# Altium PCB PCB1.PcbDoc (part 1 of 2)
Units mm, origin at the board's own origin, x right, y up, seen from the top; angles counter-clockwise.
Board outline 39 x 39 mm, 4 copper layers (Top Layer, Mid Layer 1, Mid Layer 2, Bottom Layer), stack 1.57 mm thick; 85 components, 70 nets, 394 pads, 166 vias.
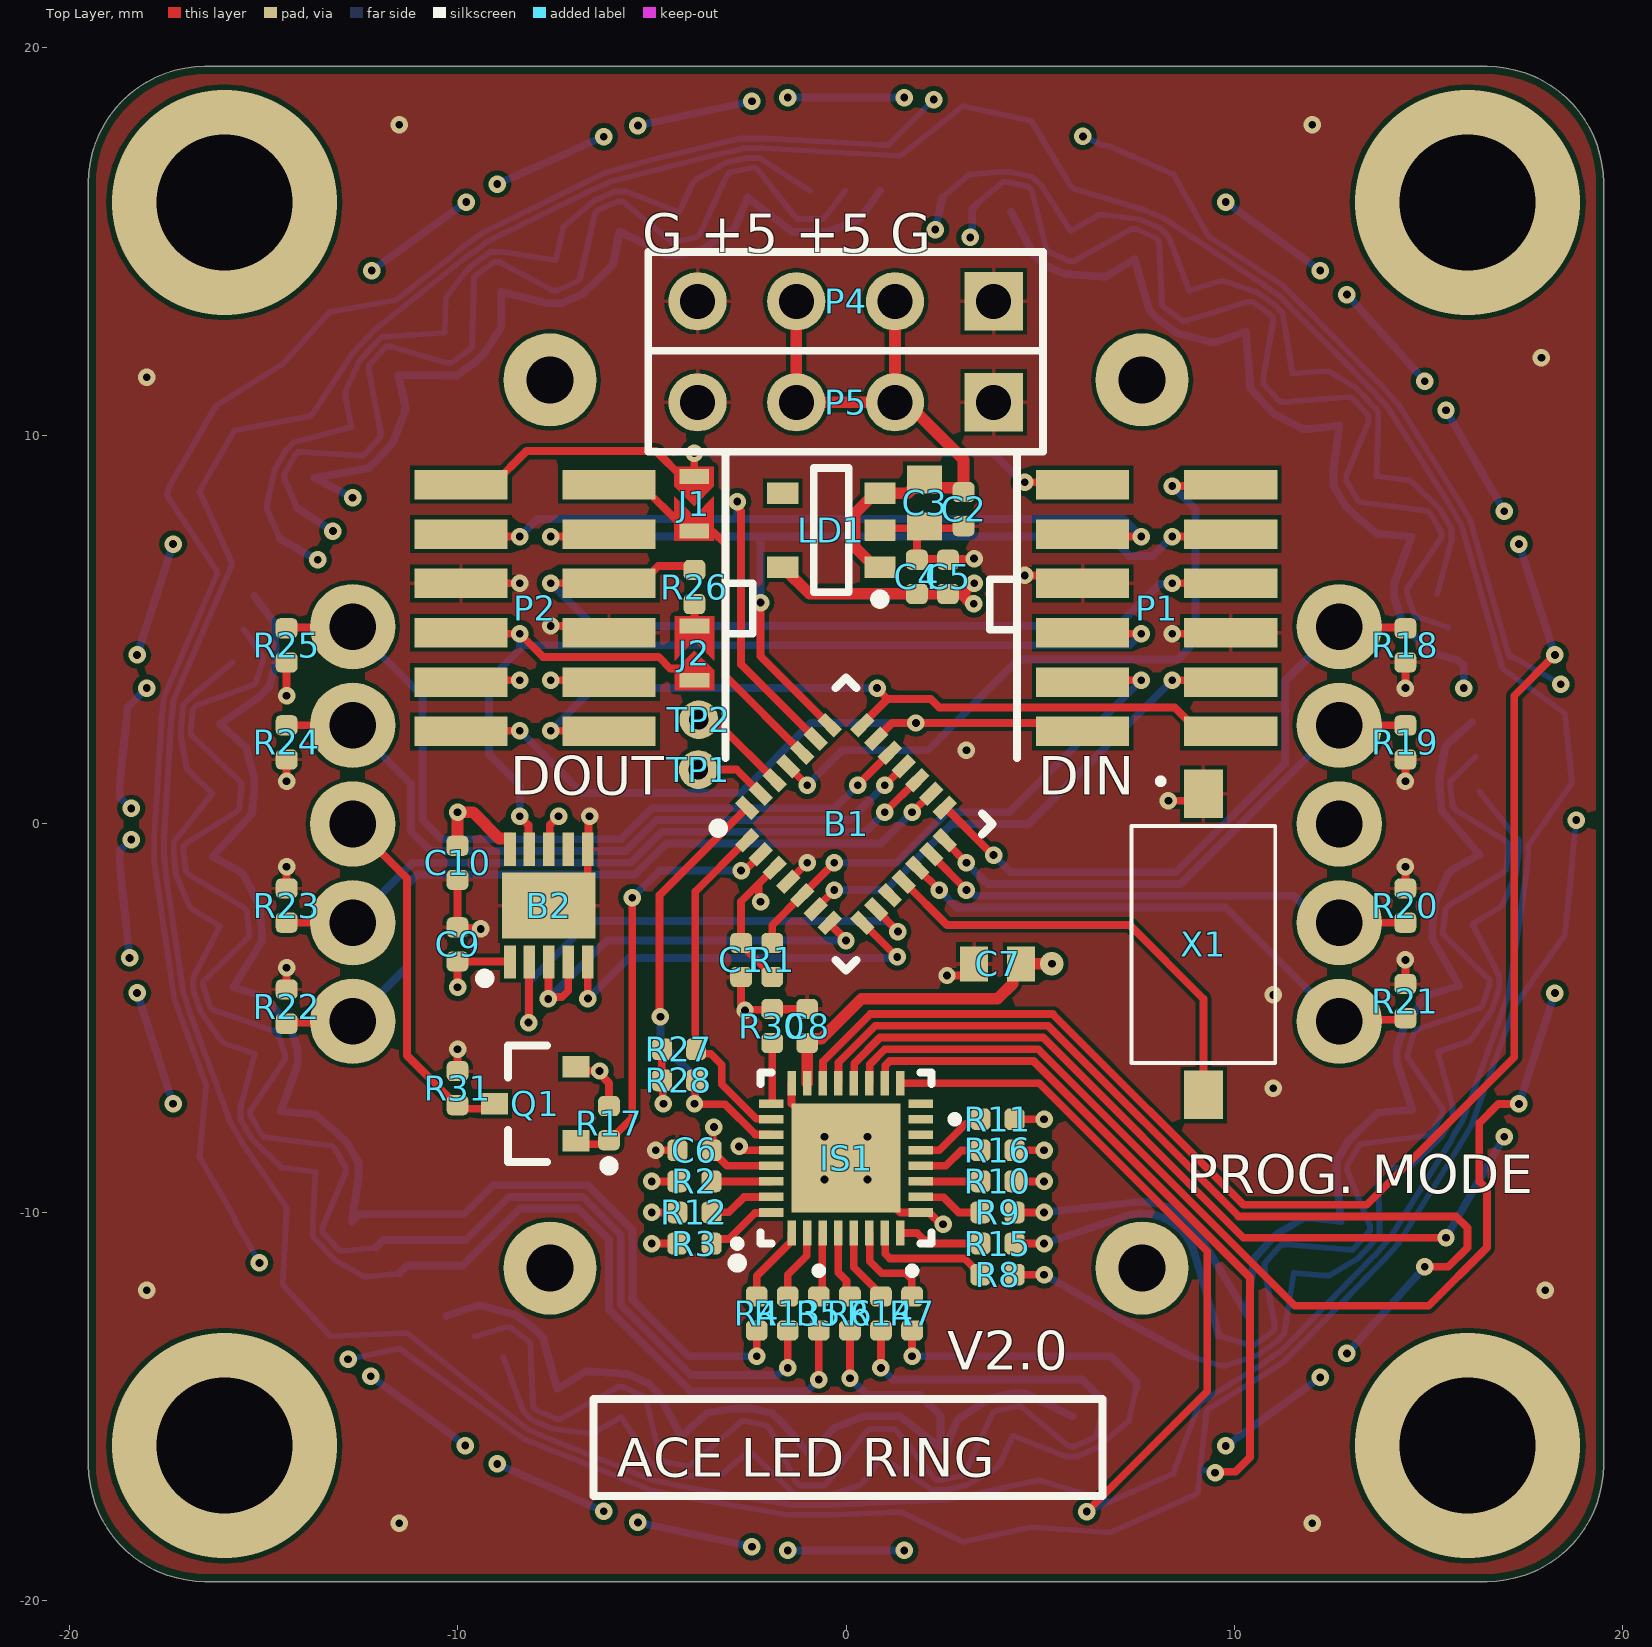
[diagram p0: Top Layer view]
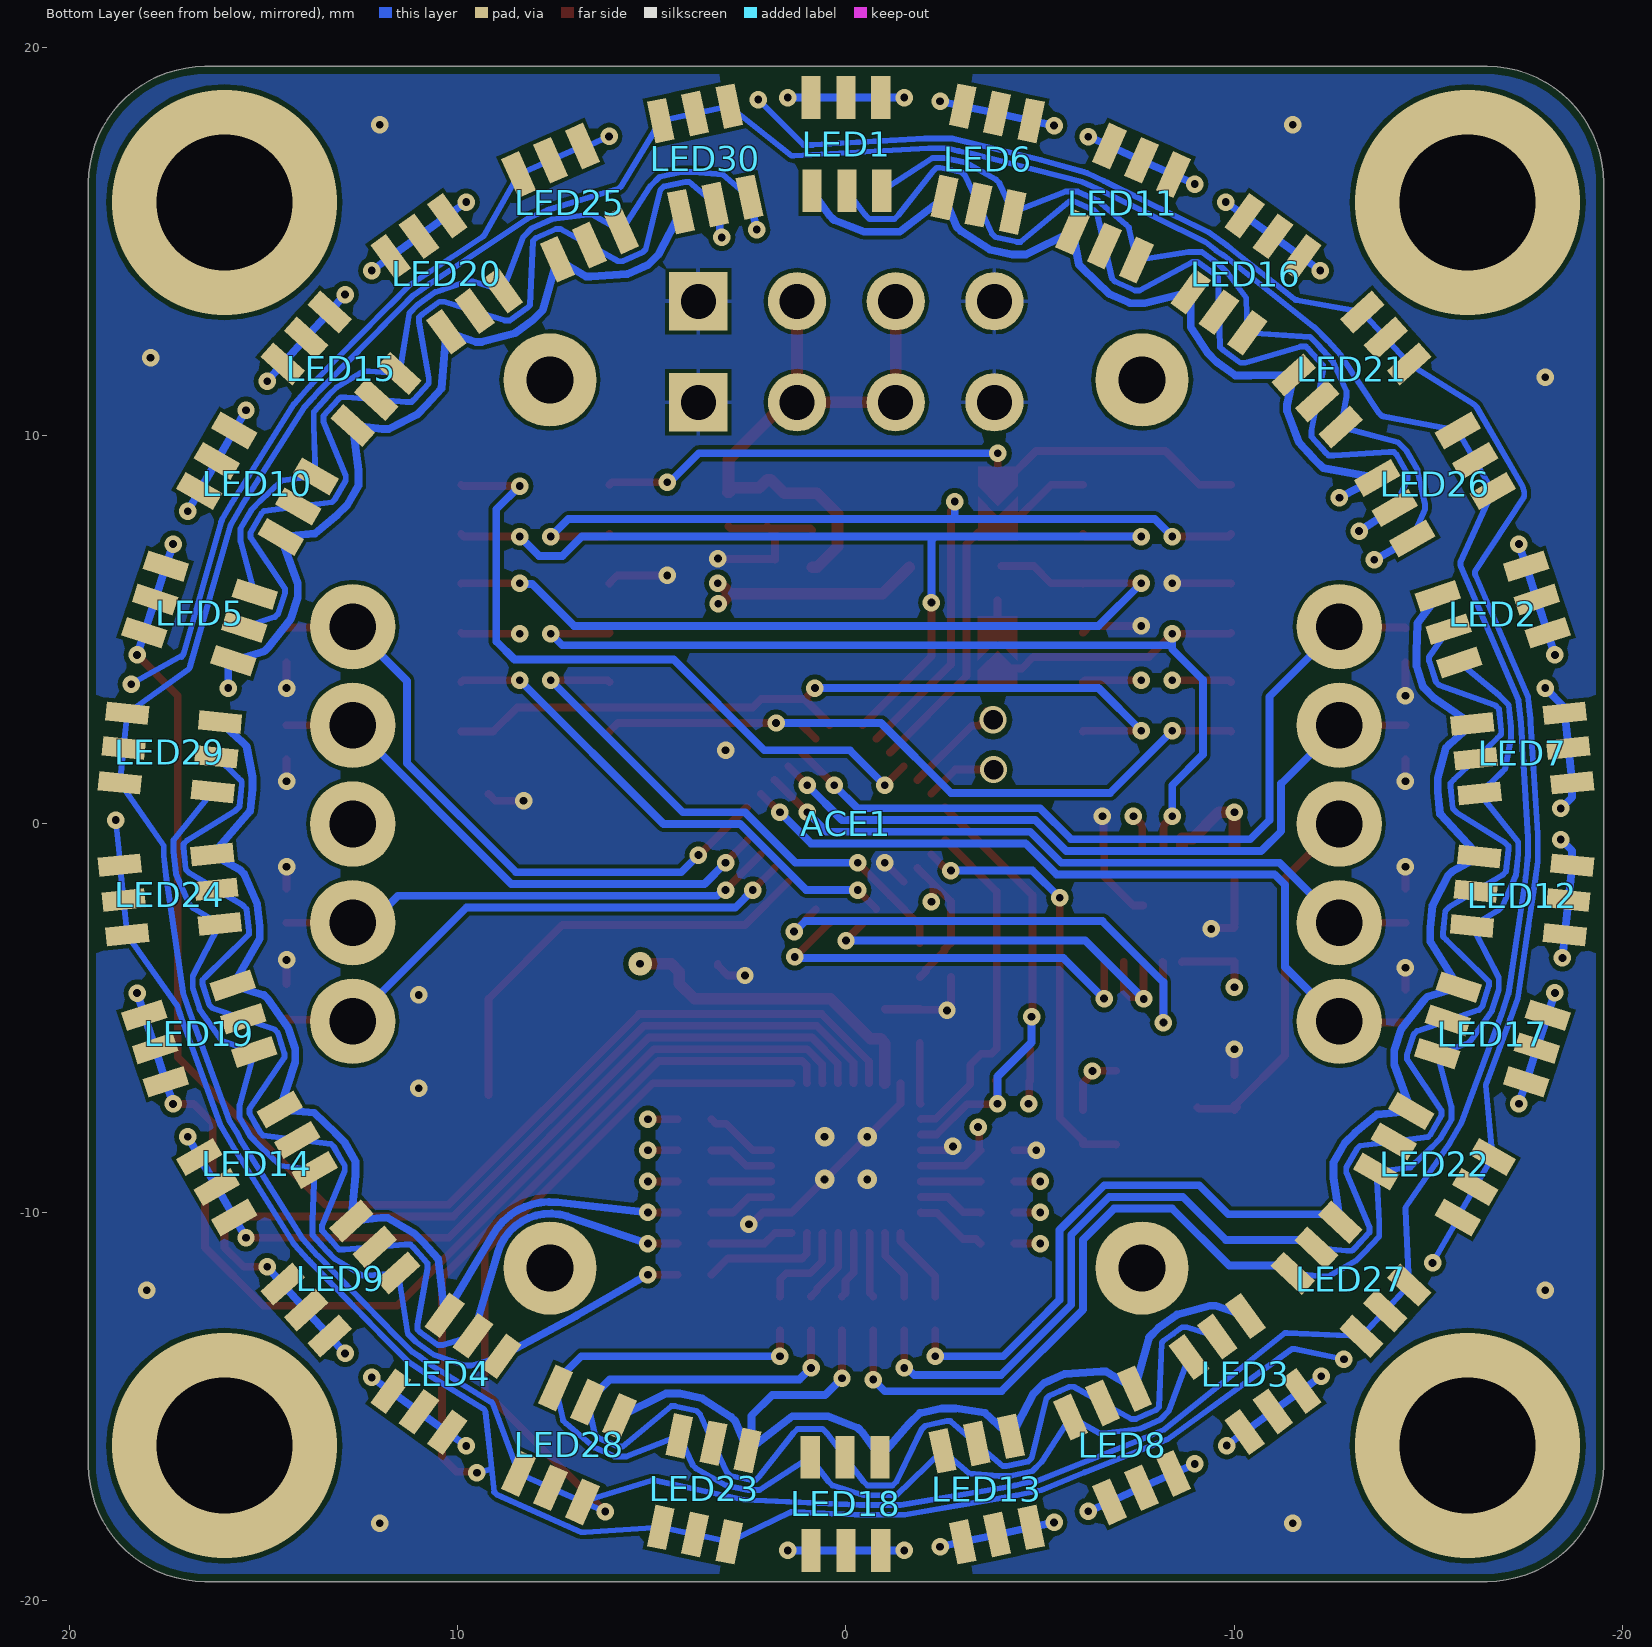
[diagram p1: Bottom Layer view, seen from below]
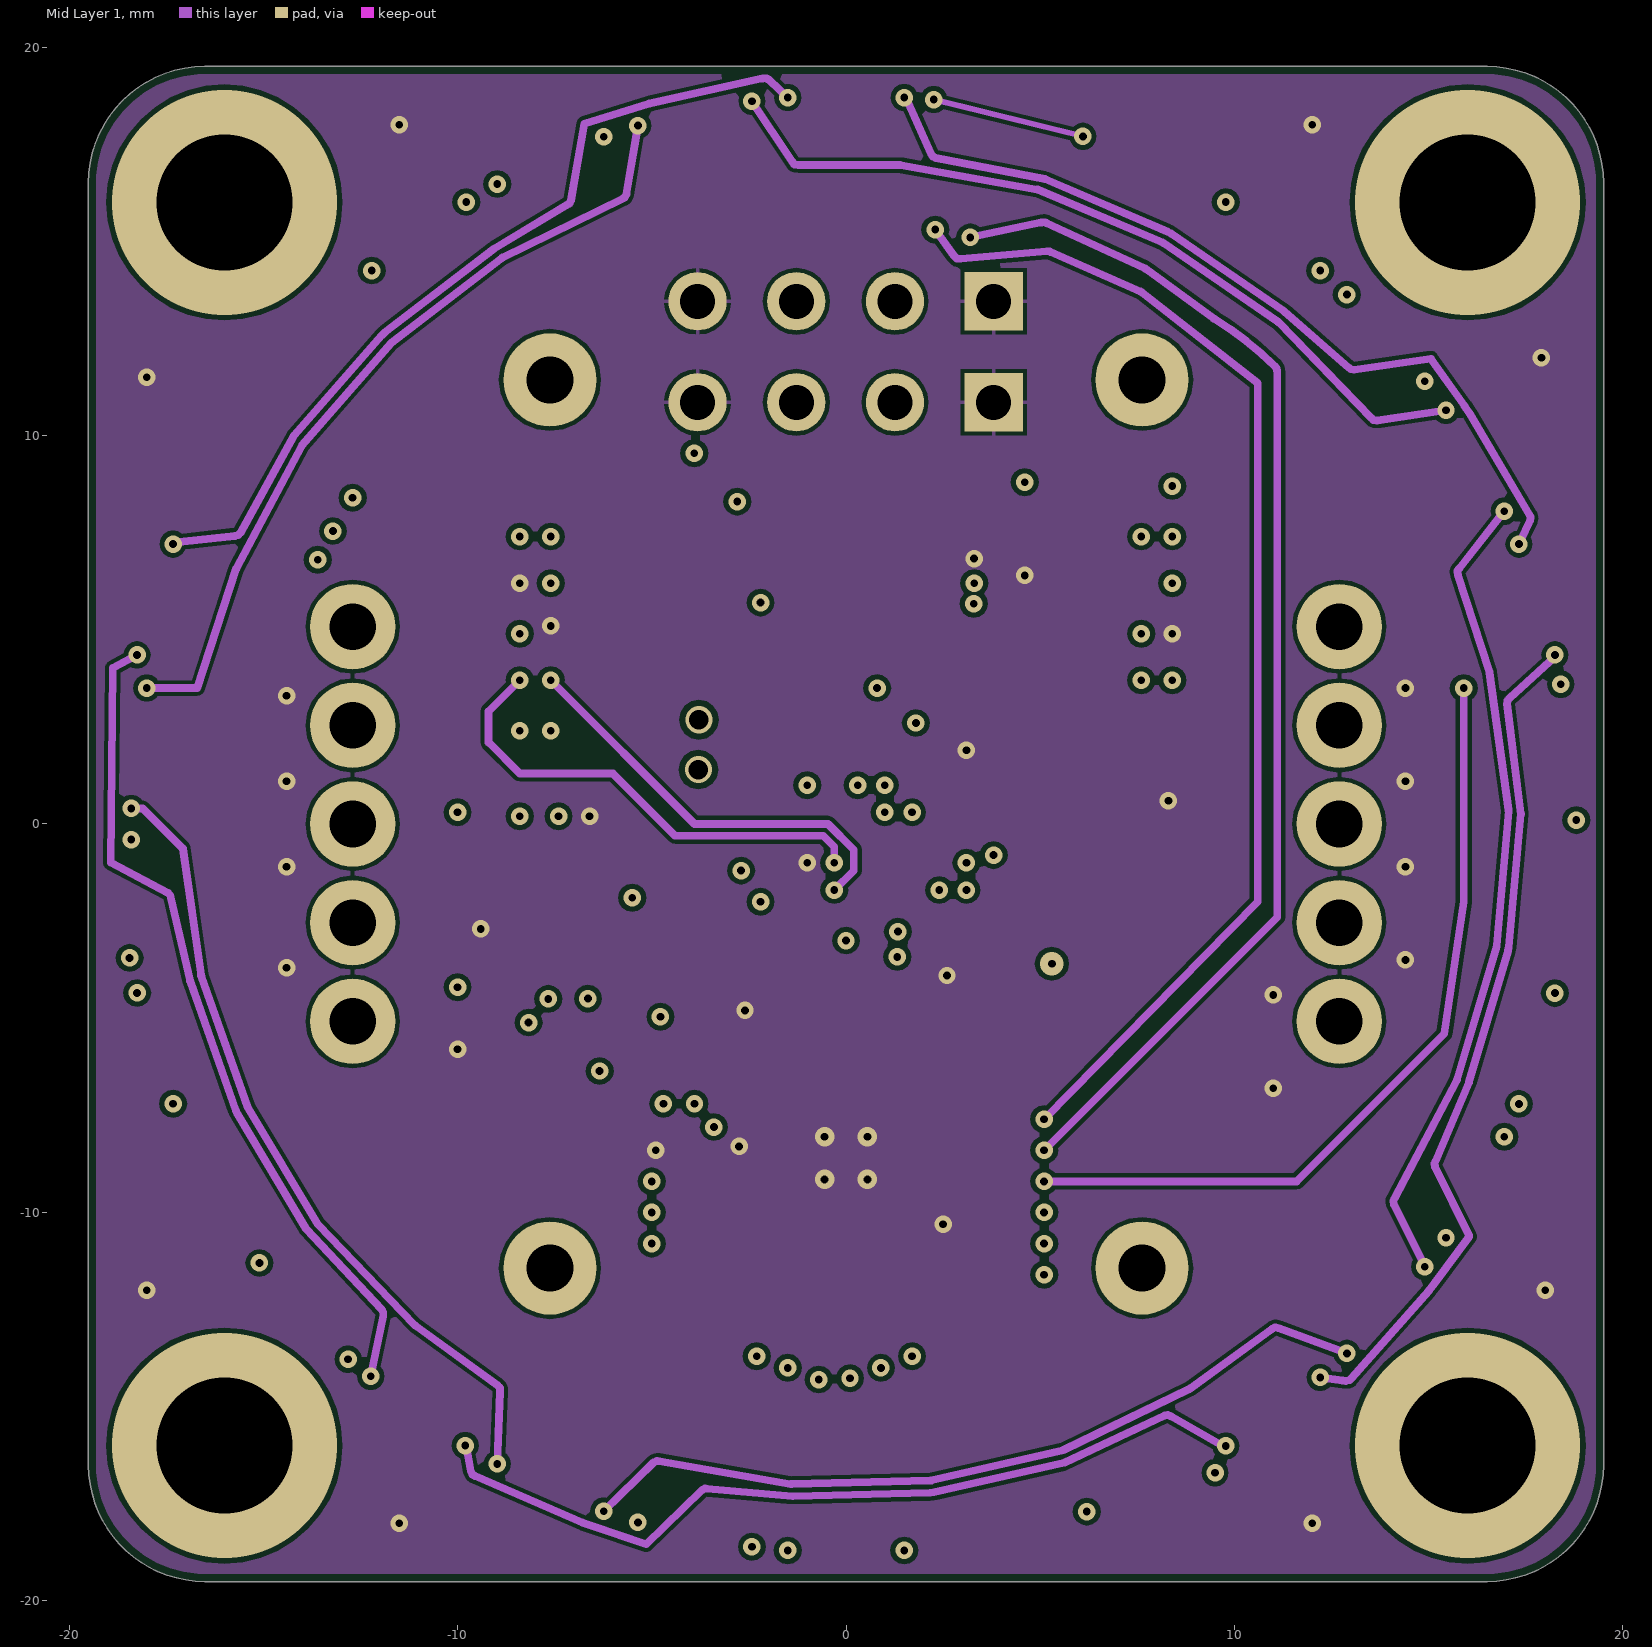
[diagram p2: Mid Layer 1]
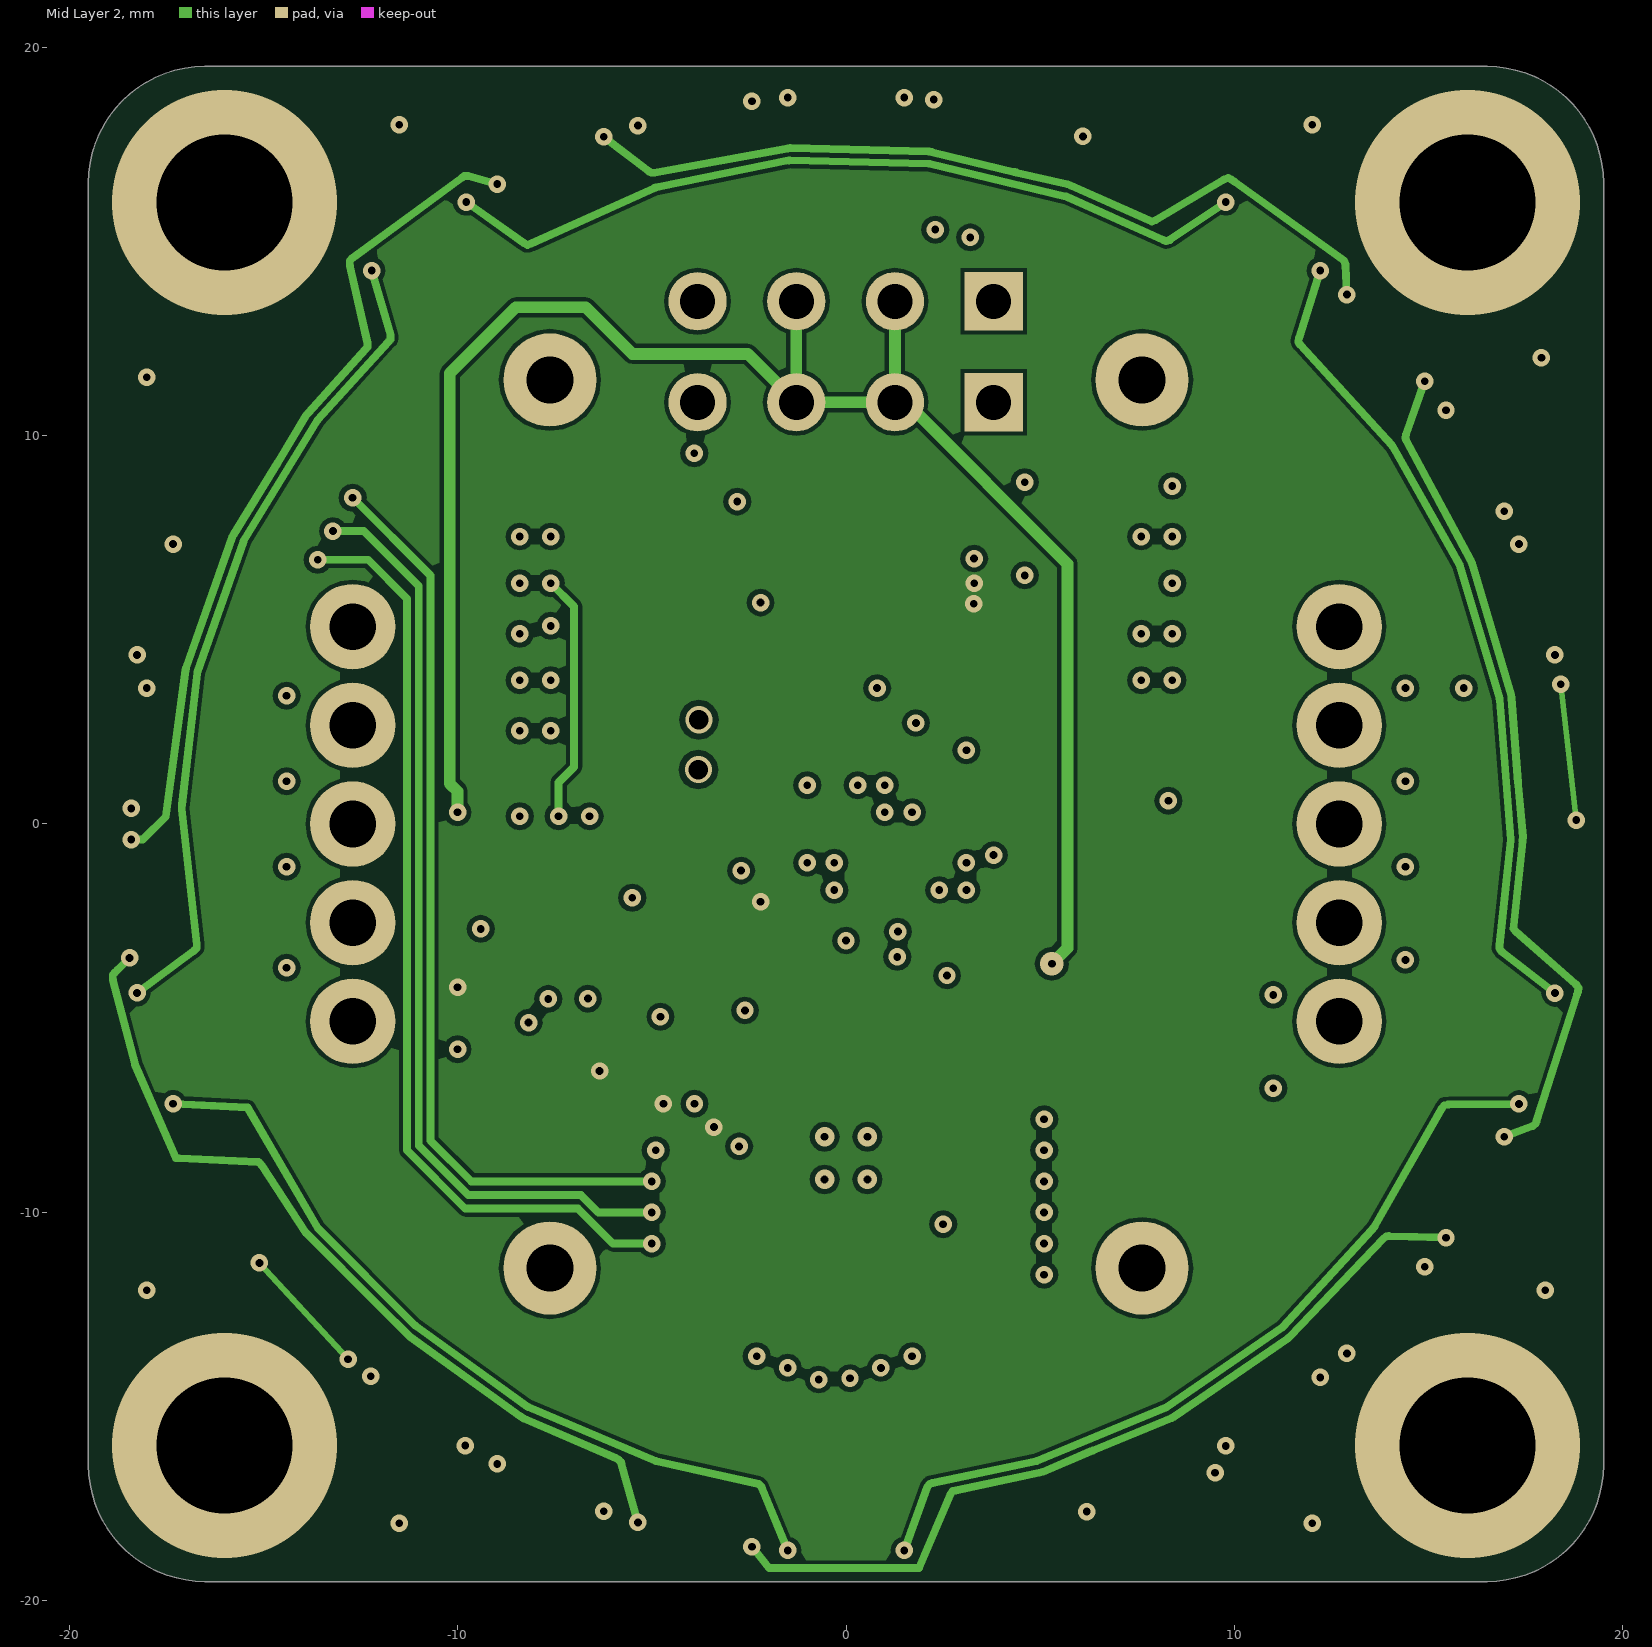
[diagram p3: Mid Layer 2]
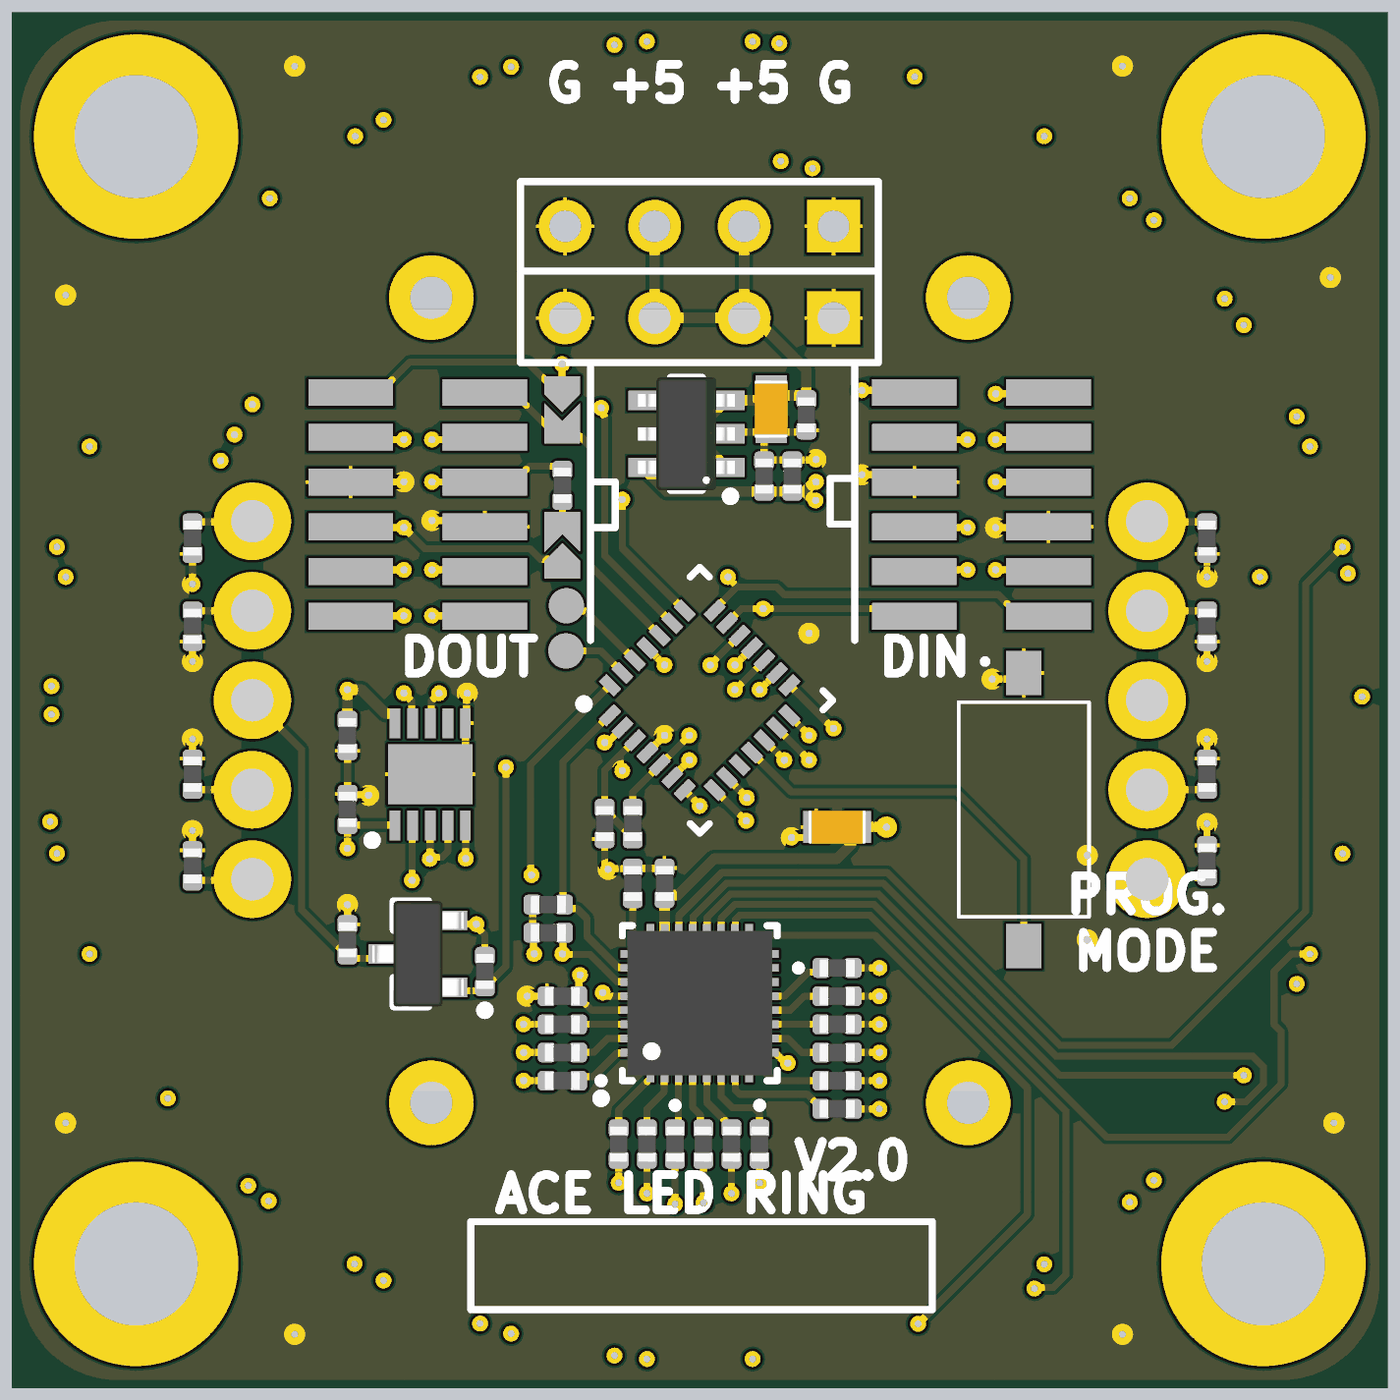
[diagram p5: 3D render of the assembled board from above, using the file's embedded part models]
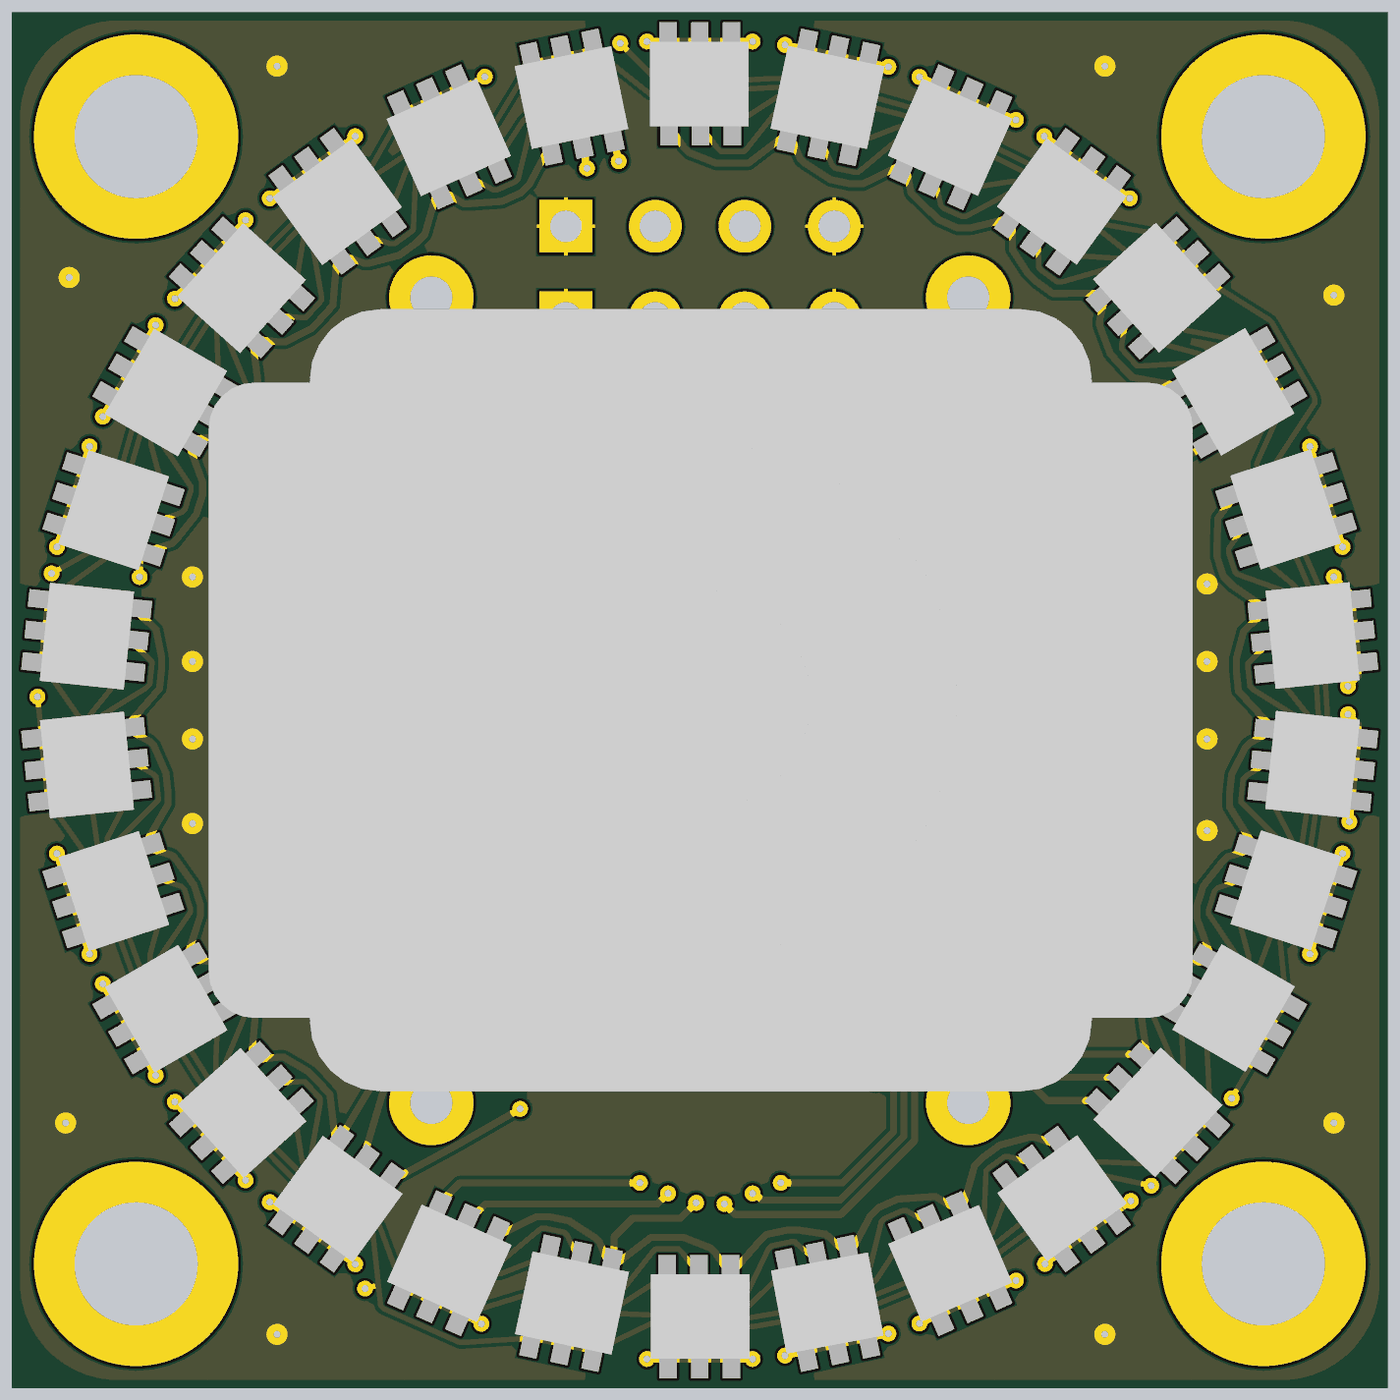
[diagram p6: 3D render of the assembled board from below, using the file's embedded part models]

## Layer stack, top to bottom
Top Solder: solder mask 0.0127, Solder Resist, Dk 3.8
Top Layer: signal copper 0.035
Dielectric 1: prepreg 0.2, 7628, Dk 4.6
Mid Layer 1: signal copper 0.0175
Core: core 1.065, FR-4, Dk 4.5
Mid Layer 2: signal copper 0.0175
Dielectric 2: prepreg 0.2, 7628, Dk 4.6
Bottom Layer: signal copper 0.035
Bottom Solder: solder mask 0.0127, Solder Resist, Dk 3.8

## Board outline
-19.5,-16.5 ccw(c-16.5,-16.5) -16.5,-19.5 0,-19.5 16.5,-19.5 ccw(c16.5,-16.5) 19.5,-16.5 19.5,16.5 ccw(c16.5,16.5) 16.5,19.5 0,19.5 -16.5,19.5 ccw(c-16.5,16.5) -19.5,16.5

## Design rules (kind name [scope] priority, off if disabled: settings)
BoardOutlineClearance [All] p1: gap=0.2 ignorepadtopadclearanceinfootprint=FALSE
Clearance [All] p1: gap=0.102 ignorepadtopadclearanceinfootprint=FALSE except(0.127: Arc-Via Track-Via SMDPad-Via THPad-Via Via-Via Via-Fill Via-Poly Via-Region Via-Text; 0.25: Arc-Hole Track-Hole SMDPad-Hole THPad-Hole Via-Hole Fill-Hole Poly-Hole Region-Hole Text-Hole)
ComponentClearance [All] p1: gap=0.102 collisioncheckmode=3 verticalgap=0.102 showdistances=TRUE
DiffPairsRouting [All] p1: maxlimit=0.102 minlimit=0.102 mostfreqgap=0.102 toplayer_minwidth=0.102 toplayer_maxwidth=1816.048 toplayer_prefwidth=0.102 midlayer1_minwidth=0.102 midlayer1_maxwidth=1816.048 midlayer1_prefwidth=0.102 midlayer2_minwidth=0.102 midlayer2_maxwidth=1816.048 midlayer2_prefwidth=0.102 bottomlayer_minwidth=0.102 bottomlayer_maxwidth=1816.048 bottomlayer_prefwidth=0.102 maxuncoupledlength=12.7
Height [All] p1: minheight=0 maxheight=1816.048 prefheight=12.7
HoleSize [All] p1: absolutevalues=TRUE maxlimit=6.3 minlimit=0.2 maxpercent=80.000 minpercent=20.000
HoleToHoleClearance [All] p1: gap=0.25 allowstackedmicrovias=FALSE
MinimumAnnularRing [All] p1: minimumring=0.076
MinimumSolderMaskSliver [All] p1: minsoldermaskwidth=0
PlaneClearance [All] p1: clearance=0.102
PlaneConnect PlaneConnectPowerPads [InPadClass('PowerPads')] p1: planeconnectstyle=Direct reliefexpansion=0.508 reliefentries=4 reliefconductorwidth=0.254 reliefairgap=0.254
PlaneConnect [All] p2: pad.planeconnectstyle=Relief pad.reliefexpansion=0.3 pad.reliefentries=4 pad.reliefconductorwidth=0.102 pad.reliefairgap=0.102 via.planeconnectstyle=Direct via.reliefexpansion=0.3 via.reliefentries=4 via.reliefconductorwidth=0.127 via.reliefairgap=0.127
PolygonConnect PolygonConnectPowerPads [All vs (InPadClass('PowerPads'))] p1: connectstyle=Direct reliefconductorwidth=0.254 reliefentries=4 polygonreliefangle="90 Angle" airgapwidth=0.254
PolygonConnect [All] p2: thpad.connectstyle=Relief thpad.reliefconductorwidth=0.102 thpad.reliefentries=4 thpad.polygonreliefangle="90 Angle" thpad.airgapwidth=0.102 smdpad.connectstyle=Relief smdpad.reliefconductorwidth=0.102 smdpad.reliefentries=4 smdpad.polygonreliefangle="90 Angle" smdpad.airgapwidth=0.102 via.connectstyle=Direct via.reliefconductorwidth=0.127 via.reliefentries=4 via.polygonreliefangle="90 Angle" via.airgapwidth=0.127
RoutingVias [All] p1: holewidth=0.2 width=0.45 viastyle="Through Hole" minholewidth=0.2 minwidth=0.45 maxholewidth=6.3 maxwidth=6.55
SilkToSilkClearance [All] p1: silktosilkclearance=0
SilkToSolderMaskClearance [IsPad] p1: minsilkscreentomaskgap=0.102 clearancetoexposedcopper=TRUE
SolderMaskExpansion [All] p1: expansion=0.075 istentingtop=FALSE
Width [All] p1: maxlimit=1816.048 minlimit=0.102 preferedwidth=0.102
20 further rules are at their usual default settings.

## Classes and differential pairs
net class ACE[1..8]: ACE1 ACE2 ACE3 ACE4 ACE5 ACE6 ACE7 ACE8
component class U_Power: C2 C3 C4 C5 LD1 P4 P5
component class U_MCU: B1 B2 C1 C9 C10 J1 J2 P1 P2 R1 R26 TP1 TP2 X1
component class U_led_ring: C6 C7 C8 IS1 LED1 LED2 LED3 LED4 LED5 LED6 LED7 LED8 LED9 LED10 LED11 LED12 LED13 LED14 LED15 LED16 LED17 LED18 LED19 LED20 LED21 LED22 LED23 LED24 LED25 LED26 LED27 LED28 LED29 LED30 R2 R3 R4 R5 R6 R7 R8 R9 R10 R11 R12 R13 R14 R15 R16 R27 R28 R30
component class U_ACE: ACE1 Q1 R17 R18 R19 R20 R21 R22 R23 R24 R25 R31

## Components (designator, comment, footprint, x,y, rotation, side; value= is the part's Value field where it differs from the comment)
ACE1 "Bourns ACE 128" "BOURNS ACE 128" 0,0 r0 bottom locked
B1 "STM32C031G6U6" QFN50P400X400X60-28N-D 0,0 r45 top
B2 "XR33202EEHBTR-F" SON50P300X300X80-11N-D -7.65,-2.1 r90 top
C1 "100n" R1005_0402i_L -2.7,-3.5 r270 top
C2 "100n" R1005_0402i_L 3.026,8.103 r270 top
C3 "22u" C1608_0603I_L 2.026,8.264 r270 top
C4 "1u" R1005_0402i_L 1.826,6.364 r90 top
C5 "100n" R1005_0402i_L 2.626,6.364 r90 top
C6 "100n" R1005_0402i_L -3.9,-8.4 r180 top
C7 "1u" C1608_0603I_L 3.9,-3.6 r180 top
C8 "100n" R1005_0402i_L -1,-5.2 r90 top
C9 "100n" R1005_0402i_L -10,-3.1 r90 top
C10 "100n" R1005_0402i_L -10,-1 r270 top
IS1 "IS31FL3729" QFN40P400X400X80_HS-33L 0,-8.6 r90 top
J1 "solder_jumper" SOLDER_JUMPER_TRIANGLE -3.4,7.8 r90 top
J2 "solder_jumper" SOLDER_JUMPER_TRIANGLE -4.408,4.843 r270 top
LD1 "NCP115 3.3V" TSOP95P280X110-6L -0.379,7.564 r180 top
LED1 "SMB-LED" ASMB-LED 0,17.5 r270 bottom
LED2 "SMB-LED" ASMB-LED -16.643,5.408 r342 bottom
LED3 "SMB-LED" ASMB-LED -10.283,-14.15 r54 bottom
LED4 "SMB-LED" ASMB-LED 10.286,-14.158 r126 bottom
LED5 "SMB-LED" ASMB-LED 16.643,5.408 r198 bottom
LED6 "SMB-LED" ASMB-LED -3.638,17.118 r282 bottom
LED7 "SMB-LED" ASMB-LED -17.404,1.829 r354 bottom
LED8 "SMB-LED" ASMB-LED -7.118,-15.987 r66 bottom
LED9 "SMB-LED" ASMB-LED 13.005,-11.71 r138 bottom
LED10 "SMB-LED" ASMB-LED 15.155,8.75 r210 bottom
LED11 "SMB-LED" ASMB-LED -7.118,15.987 r294 bottom
LED12 "SMB-LED" ASMB-LED -17.404,-1.829 r6 bottom
LED13 "SMB-LED" ASMB-LED -3.638,-17.118 r78 bottom
LED14 "SMB-LED" ASMB-LED 15.155,-8.75 r150 bottom
LED15 "SMB-LED" ASMB-LED 13.005,11.71 r222 bottom
LED16 "SMB-LED" ASMB-LED -10.286,14.158 r306 bottom
LED17 "SMB-LED" ASMB-LED -16.644,-5.405 r17.99 bottom
LED18 "SMB-LED" ASMB-LED 0,-17.5 r90 bottom
LED19 "SMB-LED" ASMB-LED 16.643,-5.408 r162 bottom
LED20 "SMB-LED" ASMB-LED 10.286,14.158 r234 bottom
LED21 "SMB-LED" ASMB-LED -13.005,11.71 r318 bottom
LED22 "SMB-LED" ASMB-LED -15.155,-8.75 r30 bottom
LED23 "SMB-LED" ASMB-LED 3.638,-17.118 r102 bottom
LED24 "SMB-LED" ASMB-LED 17.404,-1.829 r174 bottom
LED25 "SMB-LED" ASMB-LED 7.118,15.987 r246 bottom
LED26 "SMB-LED" ASMB-LED -15.155,8.75 r330 bottom
LED27 "SMB-LED" ASMB-LED -13.005,-11.71 r42.99 bottom
LED28 "SMB-LED" ASMB-LED 7.118,-15.987 r114 bottom
LED29 "SMB-LED" ASMB-LED 17.404,1.829 r186 bottom
LED30 "SMB-LED" ASMB-LED 3.638,17.118 r258 bottom
P1 "Input" "1.27mm SMD conn" 7.996,5.559 r90 top
P2 "Output" "1.27mm SMD conn" -8.006,5.559 r90 top
P4 "Header 4" HDR1X4 3.8,13.454 r180 top
P5 "Header 4" HDR1X4 3.8,10.854 r180 top
Q1 "NX3008PBKT" SOT95P230X110-3L -8,-7.2 r180 top
R1 "100k" R1005_0402i_L -1.9,-3.5 r90 top
R2 "20" R1005_0402i_L -3.9,-9.2 r180 top
R3 "51" R1005_0402i_L -3.9,-10.8 r180 top
R4 "20" R1005_0402i_L -2.3,-12.6 r270 top
R5 "51" R1005_0402i_L -0.7,-12.6 r270 top
R6 "20" R1005_0402i_L 0.1,-12.6 r270 top
R7 "51" R1005_0402i_L 1.7,-12.6 r270 top
R8 "20" R1005_0402i_L 3.9,-11.6 r0 top
R9 "51" R1005_0402i_L 3.9,-10 r0 top
R10 "20" R1005_0402i_L 3.9,-9.2 r0 top
R11 "51" R1005_0402i_L 3.9,-7.6 r0 top
R12 "20" R1005_0402i_L -3.9,-10 r180 top
R13 "20" R1005_0402i_L -1.5,-12.6 r270 top
R14 "20" R1005_0402i_L 0.9,-12.6 r270 top
R15 "20" R1005_0402i_L 3.9,-10.8 r0 top
R16 "20" R1005_0402i_L 3.9,-8.4 r0 top
R17 "100k" R1005_0402i_L -6.1,-7.7 r90 top
R18 "10k" R1005_0402i_L 14.4,4.6 r90 top
R19 "10k" R1005_0402i_L 14.4,2.1 r90 top
R20 "10k" R1005_0402i_L 14.4,-2.1 r270 top
R21 "10k" R1005_0402i_L 14.4,-4.56 r270 top
R22 "10k" R1005_0402i_L -14.4,-4.7 r270 top
R23 "10k" R1005_0402i_L -14.4,-2.1 r270 top
R24 "10k" R1005_0402i_L -14.4,2.1 r90 top
R25 "10k" R1005_0402i_L -14.4,4.6 r90 top
R26 "120" R1005_0402i_L -3.9,6.1 r90 top
R27 "10k" R1005_0402i_L -4.3,-5.8 r0 top
R28 "10k" R1005_0402i_L -4.3,-6.6 r0 top
R30 "100k" R1005_0402i_L -1.9,-5.2 r90 top
R31 "100k" R1005_0402i_L -10,-6.8 r270 top
TP1 "PAD" PAD -3.8,1.4 r90 top
TP2 "PAD" PAD -3.785,2.683 r90 top
X1 "PTS636_SM25_SMTR_LFS" PTS636SM25SMTRLFS 9.2,-3.1 r270 top

## Footprints (in the part's own frame and the unit in brackets; to place one, negate y for a bottom-side part, rotate by r counter-clockwise, add the part's x,y. Pads: shape width x height; smd on the part's side, far side on the other; paste and mask are expansions set on the pad)
"1.27mm SMD conn" [mm]
  rect 0.76x2.4 smd: 1(3.175,1.905) 2(3.175,-1.905) 3(1.905,1.905) 4(1.905,-1.905) 5(0.635,1.905) 6(0.635,-1.905) 7(-0.635,1.905) 8(-0.635,-1.905) 9(-1.905,1.905) 10(-1.905,-1.905) 11(-3.175,1.905) 12(-3.175,-1.905)
ASMB-LED [mm]
  rect 1.1x0.5 smd: 1(-1.2,0.9) 2(1.2,0.925) 3(-1.2,0) 4(1.2,0.025) 5(-1.2,-0.9) 6(1.2,-0.875)
  body extent -1.19,-1.41 1.21,1.39, height 2.8
"BOURNS ACE 128" [mm]
  round 2.2 hole 1.2: 1(-12.7,5.08) 2(-12.7,2.54) 3(-12.7,0) 4(-12.7,-2.54) 5(-12.7,-5.08) 6(12.7,-5.08) 7(12.7,-2.54) 8(12.7,0) 9(12.7,2.54) 10(12.7,5.08)
  round 2.4 hole 1.2: ""(-7.62,-11.43) ""(-7.62,11.43) ""(7.62,-11.43) ""(7.62,11.43)
  body extent -14,-11.1 13.94,11.1, height 27.55
C1608_0603I_L [mm] "Chip Capacitor, 2-Leads, Body 1.57x0.85mm, IPC High Density"
  rect 0.72x0.9 smd: 1(-0.6,0) 2(0.6,0)
  body extent -0.83,-0.48 0.83,0.48, height 0.95
HDR1X4 [mm] "Connector; Header; 4 Position"
  rect 1.5x1.5 hole 0.9: 1(0,0)
  round 1.5 hole 0.9: 2(2.54,0) 3(5.08,0) 4(7.62,0)
  silkscreen extent -1.27,-1.27 8.89,1.27
PAD [mm]
  round 1 smd: 1(0,0)
PTS636SM25SMTRLFS [mm]
  rect 1.25x1 smd: 1(-3.875,0) 2(3.875,0)
  silkscreen extent -4.25,-1.85 3.05,1.85
QFN40P400X400X80_HS-33L [mm]
  rect 0.64x0.22 smd: 1(-1.925,1.4) 2(-1.925,1) 3(-1.925,0.6) 4(-1.925,0.2) 5(-1.925,-0.2) 6(-1.925,-0.6) 7(-1.925,-1) 8(-1.925,-1.4) 17(1.925,-1.4) 18(1.925,-1) 19(1.925,-0.6) 20(1.925,-0.2) 21(1.925,0.2) 22(1.925,0.6) 23(1.925,1) 24(1.925,1.4)
  rect 0.22x0.64 smd: 9(-1.4,-1.925) 10(-1,-1.925) 11(-0.6,-1.925) 12(-0.2,-1.925) 13(0.2,-1.925) 14(0.6,-1.925) 15(1,-1.925) 16(1.4,-1.925) 25(1.4,1.925) 26(1,1.925) 27(0.6,1.925) 28(0.2,1.925) 29(-0.2,1.925) 30(-0.6,1.925) 31(-1,1.925) 32(-1.4,1.925)
  rect 2.8x2.8 smd: 33(0,0)
  silkscreen extent -2.82,-2.2 2.2,2.92, body extent -2.05,-2.05 2.05,2.05, height 0.8
QFN50P400X400X60-28N-D [mm]
  rect 0.6x0.3 smd: 1(-2.1,1.5) 2(-2.1,1) 3(-2.1,0.5) 4(-2.1,0) 5(-2.1,-0.5) 6(-2.1,-1) 7(-2.1,-1.5) 15(2.1,-1.5) 16(2.1,-1) 17(2.1,-0.5) 18(2.1,0) 19(2.1,0.5) 20(2.1,1) 21(2.1,1.5)
  rect 0.3x0.6 smd: 8(-1.5,-2.1) 9(-1,-2.1) 10(-0.5,-2.1) 11(0,-2.1) 12(0.5,-2.1) 13(1,-2.1) 14(1.5,-2.1) 22(1.5,2.1) 23(1,2.1) 24(0.5,2.1) 25(0,2.1) 26(-0.5,2.1) 27(-1,2.1) 28(-1.5,2.1)
  silkscreen extent -2.67,-2.67 2.67,2.67
R1005_0402i_L [mm] "Resistor, Chip; 1.00 mm L X 0.50 mm W X 0.40 mm H body"
  rrect50% 0.52x0.56 smd: 1(-0.44,0) 2(0.44,0)
  body extent -0.5,-0.25 0.5,0.25, height 0.4
SOLDER_JUMPER_TRIANGLE [mil]
  rect 15x30 smd paste+0 mask+0: 1(45,20) 2(-10,20)
  Top Layer region: 5,20 25,40 -20,40 -20,0 25,0
  Top Layer region: 55,40 35,40 15,20 35,0 55,0
SON50P300X300X80-11N-D [mm]
  rect 0.85x0.3 smd: 1(-1.45,1) 2(-1.45,0.5) 3(-1.45,0) 4(-1.45,-0.5) 5(-1.45,-1) 6(1.45,-1) 7(1.45,-0.5) 8(1.45,0) 9(1.45,0.5) 10(1.45,1)
  rect 1.7x2.4 smd: 11(0,0)
  silkscreen extent -2,1.52 -1.75,1.77
SOT95P230X110-3L [mm]
  rect 0.7x0.55 smd: 1(-1.05,0.95) 2(-1.05,-0.95) 3(1.05,0)
  silkscreen extent -2.03,-1.5 0.7,1.72, body extent -1.3,-1.5 1.3,1.5, height 1.1
TSOP95P280X110-6L [mm] "TSOP, 6-Leads, Body 2,87x1,50mm, Pitch 0,95mm, IPC High Density"
  rect 0.8x0.55 smd: 1(-1.25,0.95) 2(-1.25,0) 3(-1.25,-0.95) 4(1.25,-0.95) 5(1.25,0.95)
  silkscreen extent -1.38,-1.6 0.45,1.9, body extent -1.38,-1.6 1.38,1.6, height 1.1

## Part data
B1: "Mainstream Arm Cortex-M0+ MCU with 32 Kbytes of Flash memory, 12 Kbytes RAM, 48 MHz CPU, 2x USART, timers, ADC, comm. I/F, 2-3.6V", Manufacturer_Name=STMicroelectronics, Mouser Part Number=511-STM32C031G6U6, Datasheet Link=https://www.st.com/resource/en/datasheet/stm32c031c4.pdf, Geometry.Height=0.6mm, Manufacturer_Part_Number=STM32C031G6U6, Mouser Price/Stock=https://www.mouser.co.uk/ProductDetail/STMicroelectronics/STM32C031G6U6?qs=IPgv5n7u5QZqRf3nOTChhw%3D%3D
B2: "RS-422/RS-485 Interface IC Wide Supply Trans with I/O Interface", Manufacturer_Name="MaxLinear, Inc.", Mouser Part Number=701-XR33202EEHBTR-F, Datasheet Link=https://www.maxlinear.com/ds/xr33202.pdf, Geometry.Height=0.8mm, Manufacturer_Part_Number=XR33202EEHBTR-F, Mouser Price/Stock=https://www.mouser.co.uk/ProductDetail/MaxLinear/XR33202EEHBTR-F?qs=GtWAI9k6EVi4nRW8bj1LFw%3D%3D
C1 C2 C3 C4 C5 C6 C7 C8 C9 C10: library part C, "Capacitor"
LED1 LED2 LED3 LED4 LED5 LED6 LED7 LED8 LED9 LED10 LED11 LED12 LED13 LED14 LED15 LED16 LED17 LED18 LED19 LED20 LED21 LED22 LED23 LED24 LED25 LED26 LED27 LED28 LED29 LED30: library part ASMB-LED
P1 P2: library part "Header 6X2", "Header, 6-Pin, Dual row", LatestRevisionDate=17-Jul-2002, LatestRevisionNote="Re-released for DXP Platform.", Publisher="Altium Limited"
P4 P5: "Header, 4-Pin", LatestRevisionDate=17-Jul-2002, LatestRevisionNote="Re-released for DXP Platform.", Publisher="Altium Limited"
Q1: library part MOSFET-P, "P-Channel MOSFET", LatestRevisionDate=17-Jul-2002, LatestRevisionNote="Re-released for DXP Platform.", PackageDescription="TO, Flat Index; 3 In-Line, Axial Leads; Body Dia. 4.6mm; Lead Dia. 0.5 mm (max)", PackageReference=E3, PackageVersion=1995/1996, Published=8-Jun-2000, Publisher="Altium Limited"
R1 R2 R3 R4 R5 R6 R7 R8 R9 R10 R11 R12 R13 R14 R15 R16 R17 R18 R19 R20 R21 R22 R23 R24 R25 R26 R27 R28 R30 R31: library part R, "R"
X1: "Tactile Switches Tact 50mA 12VDC, 6.0x3.5, 2.5mm H, 180gf, G leads, No ground pin, White Actuator", Manufacturer_Name="C & K COMPONENTS", Manufacturer_Part_Number="PTS636 SM25 SMTR LFS", Mouser Part Number=611-PTS636SM25SMTRLF, Datasheet Link="https://componentsearchengine.com/Datasheets/1/PTS636 SM25 SMTR LFS.pdf", Geometry.Height=2.7mm, Mouser Price/Stock=https://www.mouser.co.uk/ProductDetail/CK/PTS636-SM25-SMTR-LFS?qs=vLWxofP3U2yIXR4iooxesw%3D%3D

## Via types
v1: diameter 0.45, hole 0.2, Top Layer to Bottom Layer, 155 vias
v2: diameter 5.8, hole 3.5, Top Layer to Bottom Layer, 4 vias
v3: diameter 0.5, hole 0.2, Top Layer to Bottom Layer, 4 vias
v4: diameter 0.7, hole 0.5, Top Layer to Bottom Layer, 2 vias
v5: diameter 0.6, hole 0.2, Top Layer to Bottom Layer, 1 vias

## Nets (pads, with @x,y where several pads share a name; then routed paths per layer and width w, separated by ;. In a path a pad name is that pad's centre, name@x,y a point inside that pad or via, vN(x,y) a via of type N, cw(c..) or ccw(c..) an arc to the next point about the centre after c; other vN are vias at no path point)
+3V3: B1.3 B2.1 C1.1 C4.1 C5.1 C6.1 C9.1 IS1.29 LD1.5 Q1.2 R1.1 R17.2 R27.1 R28.1 | length 17.1
  Top Layer w0.2: v1(-10,-4.2) C9.1@-10,-3.54 -8.66,-3.54 B2.1@-8.65,-3.55 ; Q1.2@-6.95,-6.35 -6.946,-6.354 -6.346,-6.354 v1(-6.342,-6.358) -6.342,-6.426 -6.1,-6.668 R17.2@-6.1,-7.36 ; R27.1@-4.74,-5.8 R28.1@-4.74,-6.6 -4.72,-6.62 -4.72,-7.18 v1(-4.7,-7.2) ; v1(-3.4,-7.8) -3.43,-7.83 -3.43,-8.37 C6.1@-3.46,-8.4 -3.46,-8.404 -3.064,-8.8 IS1.29@-1.925,-8.8 ; v1(-2.2,-2) -2.248,-1.952 -2.248,-1.584 -2.269,-1.562 ; R1.1@-1.9,-3.94 -1.904,-3.94 -2.061,-3.782 -2.061,-3.739 -2.539,-3.262 -2.539,-3.218 -2.696,-3.06 C1.1@-2.7,-3.06 -2.7,-1.993 -2.269,-1.562 ; B1.3@-1.838,-1.131 -2.269,-1.562
  Top Layer w0.3: LD1.5@-1.629,6.613 -0.939,5.924 C4.1@1.826,5.924 2.976,5.924 3.228,5.672 v1(3.287,5.672) ; 3.06,6.001 3.259,6.2 v1(3.3,6.2)
A_N: B2.8 P1.6 P2.6 R26.2 | length 29.6
  Top Layer w0.2: B2.8@-7.65,-0.65 -7.625,-0.625 -7.625,-0.025 v1(-7.4,0.2) ; v1(-7.6,6.2) P2.6@-6.107,6.2 ; P2.6@-6.101,6.194 P2.6@-6.107,6.2 ; R26.2@-4,6.64 -4.835,6.64 -5.275,6.2 P2.6@-6.107,6.2 ; v1(8.4,6.2) 9.895,6.2 P1.6@9.901,6.194
  Mid Layer 2 w0.2: v1(-7.6,6.2) -7,5.6 -7,1.468 -7.4,1.068 v1(-7.4,0.2)
  Bottom Layer w0.2: v1(-7.6,6.2) -6.5,5.1 7,5.1 8.079,6.179 8.379,6.179 v1(8.4,6.2)
ACE1: ACE1.1 B1.16 R22.2 | length 20.3
  Top Layer w0.2: R22.2@-14.4,-5.14 -14.37,-5.11 -12.73,-5.11 ACE1.1@-12.7,-5.08 ; v1(1.7,0.3) B1.16@2.192,0.778
  Bottom Layer w0.2: ACE1.1@-12.7,-5.08 -11.3,-3.68 -11.3,-1.567 -11.033,-1.3 -5.42,-1.3 -4.62,-0.5 0.9,-0.5 v1(1.7,0.3)
ACE2: ACE1.2 B1.17 R23.2 | length 17.8
  Top Layer w0.2: R23.2@-14.4,-2.54 ACE1.2@-12.7,-2.54 ; v1(1,0.3) B1.17@1.838,1.131
  Bottom Layer w0.2: ACE1.2@-12.7,-2.54 -11.158,-0.998 -5.545,-0.998 -4.745,-0.198 0.502,-0.198 v1(1,0.3)
ACE3: ACE1.4 B1.18 R24.2 | length 18.8
  Top Layer w0.2: R24.2@-14.4,2.54 ACE1.4@-12.7,2.54 ; v1(1,1) B1.18@1.485,1.485
  Bottom Layer w0.2: ACE1.4@-12.7,2.54 -11.2,1.04 -11.2,-0.183 -10.686,-0.697 -5.67,-0.697 -4.87,0.103 0.103,0.103 v1(1,1)
ACE4: ACE1.5 B1.19 R25.2 | length 20.6
  Top Layer w0.2: R25.2@-14.4,5.04 -14.38,5.06 -12.72,5.06 ACE1.5@-12.7,5.08 ; v1(0.3,1) 0.3,1.004 1.131,1.835 B1.19@1.131,1.838
  Bottom Layer w0.2: ACE1.5@-12.7,5.08 -10.898,3.278 -10.898,0.098 -10.405,-0.395 -5.795,-0.395 -4.995,0.405 -0.295,0.405 v1(0.3,1)
ACE5: ACE1.6 B1.15 R18.2 | length 16.4
  Top Layer w0.2: B1.15@2.546,0.424 2.561,0.424 3.785,-0.8 v1(3.8,-0.8) ; ACE1.6@12.7,5.08 12.72,5.06 14.38,5.06 R18.2@14.4,5.04
  Bottom Layer w0.2: v1(3.8,-0.8) 4.242,-1.242 8.492,-1.242 11.3,1.567 11.3,3.68 ACE1.6@12.7,5.08
ACE6: ACE1.7 B1.14 R19.2 | length 14
  Top Layer w0.2: B1.14@2.546,-0.424 2.546,-0.435 3.1,-0.989 v1(3.1,-1) ; ACE1.7@12.7,2.54 R19.2@14.4,2.54
  Bottom Layer w0.2: v1(3.1,-1) 3.644,-1.543 8.617,-1.543 ACE1.7@12.7,2.54
ACE7: ACE1.9 B1.13 R20.2 | length 12.9
  Top Layer w0.2: B1.13@2.192,-0.778 2.192,-0.785 3.1,-1.693 v1(3.1,-1.7) ; ACE1.9@12.7,-2.54 R20.2@14.4,-2.54
  Bottom Layer w0.2: v1(3.1,-1.7) 3.168,-1.7 3.313,-1.845 11.532,-1.845 12.227,-2.54 ACE1.9@12.7,-2.54
ACE8: ACE1.10 B1.12 R21.2 | length 14.2
  Top Layer w0.2: B1.12@1.838,-1.131 1.838,-1.135 2.4,-1.696 v1(2.4,-1.7) ; ACE1.10@12.7,-5.08 12.74,-5.04 14.36,-5.04 R21.2@14.4,-5
  Bottom Layer w0.2: v1(2.4,-1.7) 2.852,-2.152 9.772,-2.152 ACE1.10@12.7,-5.08
B_P: B2.9 J2.1 P1.7 P2.7 | length 30.2
  Top Layer w0.2: P2.7@-9.911,4.924 -9.887,4.9 v1(-8.4,4.9) -7.801,4.301 -4.824,4.301 -4.523,4 -4,4 ; v1(-8.4,0.2) -8.175,-0.025 -8.175,-0.625 B2.9@-8.15,-0.65 ; P1.7@6.091,4.924 6.115,4.9 v1(7.6,4.9)
  Bottom Layer w0.2: v1(-8.4,0.2) -8.4,1 -9.187,1.787 -9.187,3.713 -8.4,4.5 -8.4,4.6 ; v1(-8.4,4.9) -8.4,4.6 ; v1(7.6,4.9) 7.3,4.6 -8.4,4.6
BTN: B1.11 X1.2 | length 11.4
  Top Layer w0.2: B1.11@1.485,-1.485 2.6,-2.6 7.3,-2.6 9.2,-4.5 X1.2@9.2,-6.975
GND: B1.4 B2.6 B2.11 C1.2 C2.2 C3.2 C4.2 C5.2 C6.2 C7.2 C8.2 C9.2 C10.2 IS1.9 IS1.24 IS1.28 IS1.33 LD1.2 P1.5 P1.8 P2.5 P2.8 P4.1 P4.4 P5.1 P5.4 R18.1 R19.1 R20.1 R21.1 R22.1 R23.1 R24.1 R25.1 R30.2 R31.1 X1.1 | length 34.1
  Top Layer w0.2: R22.1@-14.4,-4.26 v1(-14.4,-3.7) ; R23.1@-14.4,-1.66 v1(-14.4,-1.1) ; v1(-14.4,1.1) R24.1@-14.4,1.66 ; v1(-14.4,3.3) R25.1@-14.4,4.16 ; R31.1@-10,-6.46 v1(-10,-5.8) ; C9.2@-10,-2.66 -9.98,-2.68 -9.42,-2.68 v1(-9.4,-2.7) ; C9.2@-10,-2.56 C10.2@-10,-1.44 ; P2.5@-9.911,6.194 -9.905,6.2 v1(-8.4,6.2) ; B2.11@-7.65,-2.1 -7.4,-2.1 -6.65,-1.35 B2.6@-6.65,-0.65 -6.625,-0.625 -6.625,0.175 v1(-6.6,0.2) ; v1(-7.6,5.1) -6.277,5.1 P2.8@-6.101,4.924 ; v1(-4.9,-8.4) C6.2@-4.34,-8.4 ; v1(-2.753,-8.3) -2.653,-8.4 IS1.28@-1.925,-8.4 ; C1.2@-2.7,-3.94 -2.7,-4.632 -2.6,-4.732 v1(-2.6,-4.8) -2.58,-4.78 -1.02,-4.78 C8.2@-1,-4.76 R30.2@-1.9,-4.76 ; B1.4@-1.485,-1.485 v1(-1,-1) ; IS1.24@-1.4,-6.675 -1.4,-7.2 v3(-0.55,-8.05) IS1.33@0,-8.6 v3(0.55,-9.15) 1.4,-10 IS1.9@1.925,-10 2.135,-10 2.435,-10.3 v1(2.5,-10.3) ; LD1.2@0.871,7.564 0.921,7.614 C3.2@1.976,7.614 ; C3.2@2.026,7.664 C3.2@1.976,7.614 ; v1(2.6,-3.9) 3.04,-3.9 3.3,-3.64 C7.2@3.3,-3.6 ; C2.2@3.026,7.664 2.976,7.613 C3.2@1.976,7.614 ; v1(3.296,6.833) 3.281,6.818 2.626,6.818 1.841,6.818 C4.2@1.826,6.803 1.826,7.464 C3.2@1.976,7.614 ; v1(4.6,6.4) 5.885,6.4 P1.5@6.091,6.194 ; v1(8.3,0.6) 9.025,0.6 X1.1@9.2,0.775 ; v1(8.4,4.9) 9.877,4.9 P1.8@9.901,4.924 ; R21.1@14.4,-4.12 v1(14.4,-3.5) ; R20.1@14.4,-1.66 v1(14.4,-1.1) ; v1(14.4,1.1) R19.1@14.4,1.66 ; v1(14.4,3.5) R18.1@14.4,4.16
  other v1: -11.5,-18 12,-18 -18,-12 18,-12 11,-6.8 11,-4.4 3.1,1.9 -18,11.5 17.9,12 -11.5,18 12,18
  other v3: -0.55,-9.15 0.55,-8.05
INT: B1.6 P1.10 P2.10 | length 25.5
  Top Layer w0.2: v1(-7.6,3.7) -6.147,3.7 P2.10@-6.101,3.654 ; B1.6@-0.778,-2.192 -0.778,-2.185 -0.3,-1.707 v1(-0.3,-1.7) ; v1(8.4,3.7) 9.855,3.7 P1.10@9.901,3.654
  Mid Layer 1 w0.2: v1(-7.6,3.7) -3.902,0.002 -0.462,0.002 0.2,-0.66 0.2,-1.2 v1(-0.3,-1.7)
  Bottom Layer w0.2: v1(-0.3,-1.7) 1.027,-1.7 2.725,-0.002 4.698,-0.002 v1(8.4,3.7)
MISO: J1.1 P1.1 P2.1 | length 17.6
  Top Layer w0.2: P2.1@-9.911,8.734 -9.091,8.734 -8.225,9.6 -4.891,9.6 -4.19,8.9 J1.1@-4,8.9 ; v1(-3.908,9.543) J1.1@-3.908,8.943 J1.1@-3.856,8.995 ; v1(4.6,8.8) 6.025,8.8 P1.1@6.091,8.734
  Bottom Layer w0.2: v1(-3.908,9.543) 3.789,9.543 4.532,8.8 v1(4.6,8.8)
MISO_MCU: B1.24 J1.2 P2.2 | length 9.9
  Top Layer w0.2: P2.2@-6.101,8.734 -5.281,8.734 -4.208,7.661 -4.208,7.594 -4.118,7.503 -3.403,7.503 -3.1,7.2 -3.1,3.807 B1.24@-1.131,1.838
MOSI_MCU: B1.25 P1.2 | length 18
  Top Layer w0.2: B1.25@-1.485,1.485 v1(-1,1) ; v1(8.4,8.7) 9.867,8.7 P1.2@9.901,8.734
  Bottom Layer w0.2: v1(-1,1) -0.1,1.9 2.1,1.9 4.435,4.235 8.535,4.235 9,4.7 9,8.1 v1(8.4,8.7)
NetB1_1: B1.1 IS1.26 R27.2 | length 8.9
  Top Layer w0.2: B1.1@-2.546,-0.424 -2.563,-0.424 -3.88,-1.741 -3.88,-5.78 -3.746,-5.914 -3.486,-5.914 -3.2,-6.2 -3.2,-6.7 -2.31,-7.59 -1.935,-7.59 IS1.26@-1.925,-7.6
NetB1_2: B1.2 Q1.1 R17.1 | length 11.1
  Top Layer w0.2: Q1.1@-6.95,-8.25 -6.945,-8.245 -6.105,-8.245 R17.1@-6.1,-8.24 ; R17.1@-6.1,-8.14 -6.08,-8.14 -5.5,-7.56 v1(-5.5,-1.9) ; v1(-2.7,-1.2) -2.614,-1.2 B1.2@-2.192,-0.778
  Bottom Layer w0.2: v1(-5.5,-1.9) -4.8,-1.2 v1(-2.7,-1.2)
NetB1_26: B1.26 TP2.1 | length 2.6
  Top Layer w0.2: TP2.1@-3.621,2.914 -3.621,2.736 -3.416,2.53 -3.237,2.53 B1.26@-1.838,1.131
  other v4: -3.785,2.683
NetB1_27: B1.27 TP1.1 | length 1.9
  Top Layer w0.2: v4(-3.8,1.4) -2.814,1.4 B1.27@-2.192,0.778
NetB1_28: B1.28 IS1.27 R28.2 | length 11.9
  Top Layer w0.2: v1(-4.776,-4.963) -4.8,-4.938 -4.8,-1.83 B1.28@-2.546,0.424 ; R28.2@-3.86,-6.6 -3.88,-6.62 -3.88,-7.18 v1(-3.9,-7.2) -3.887,-7.213 -3.113,-7.213 -2.337,-7.99 -1.935,-7.99 IS1.27@-1.925,-8
  Bottom Layer w0.2: v1(-4.776,-4.963) -4.776,-5.624 -3.9,-6.5 v1(-3.9,-7.2)
NetIS1_1: IS1.1 R4.1 | length 2
  Top Layer w0.2: R4.1@-2.3,-12.16 -2.3,-11.635 -1.4,-10.735 IS1.1@-1.4,-10.525
NetIS1_2: IS1.2 R13.1 | length 1.8
  Top Layer w0.2: R13.1@-1.5,-12.16 -1.5,-11.6 -1.01,-11.11 -1.01,-10.535 IS1.2@-1,-10.525
NetIS1_3: IS1.3 R5.1 | length 1.7
  Top Layer w0.2: R5.1@-0.7,-12.16 -0.61,-12.07 -0.61,-10.535 IS1.3@-0.6,-10.525
NetIS1_4: IS1.4 R6.1 | length 1.8
  Top Layer w0.2: IS1.4@-0.2,-10.525 -0.2,-11.546 0.013,-11.759 0.013,-12.073 R6.1@0.1,-12.16
NetIS1_5: IS1.5 R14.1 | length 1.9
  Top Layer w0.2: IS1.5@0.2,-10.525 0.2,-11.412 0.739,-11.951 0.739,-12.002 0.896,-12.16 R14.1@0.9,-12.16
NetIS1_6: IS1.6 R7.1 | length 2.5
  Top Layer w0.2: IS1.6@0.6,-10.525 0.61,-10.535 0.61,-11.257 0.918,-11.565 1.54,-11.565 1.692,-11.717 1.692,-12.152 R7.1@1.7,-12.16
NetIS1_7: IS1.7 R8.1 | length 3.2
  Top Layer w0.2: IS1.7@1,-10.525 1.01,-10.535 1.01,-11.065 1.127,-11.182 3.046,-11.182 3.46,-11.596 R8.1@3.46,-11.6
NetIS1_8: IS1.8 R15.1 | length 2.2
  Top Layer w0.2: IS1.8@1.4,-10.525 1.825,-10.525 2.1,-10.8 2.361,-10.8 R15.1@3.46,-10.8
NetIS1_10: IS1.10 R9.1 | length 1.7
  Top Layer w0.2: IS1.10@1.925,-9.6 1.935,-9.61 2.51,-9.61 2.9,-10 R9.1@3.46,-10
NetIS1_11: IS1.11 R10.1 | length 1.5
  Top Layer w0.2: IS1.11@1.925,-9.2 R10.1@3.46,-9.2
NetIS1_12: IS1.12 R16.1 | length 1.7
  Top Layer w0.2: IS1.12@1.925,-8.8 2.57,-8.8 2.966,-8.404 3.456,-8.404 R16.1@3.46,-8.4
NetIS1_13: IS1.13 R11.1 | length 1.9
  Top Layer w0.2: IS1.13@1.925,-8.4 2.4,-8.4 3.086,-7.714 3.346,-7.714 R11.1@3.46,-7.6
NetIS1_17: IS1.17 LED26.1 LED26.3 LED26.5 LED27.1 LED27.3 LED27.5 LED28.1 LED28.3 LED28.5 LED29.1 LED29.3 LED29.5 LED30.1 LED30.3 LED30.5 | length 134.7
  Top Layer w0.2: IS1.17@1.4,-6.675 4.975,-6.675 9.3,-11 9.3,-14.6 v1(6.2,-17.7)
  Bottom Layer w0.15: v1(6.2,-17.7) LED28.5@6.784,-17.449 ; LED28.5@6.784,-17.449 5.02,-16.906 5,-16.9 4.978,-16.9 4.914,-16.9 2.63,-17.395 -0.343,-17.53 -1.407,-17.53 -4.342,-17.032 -4.564,-16.968 -4.569,-16.967 -4.589,-16.962 -4.9,-16.913 -7.683,-15.806 -8.191,-15.587 -11.256,-13.135 -11.297,-13.102 -11.353,-13.102 LED27.1@-13.269,-13.186 LED27.3@-13.883,-12.528 LED27.5@-14.496,-11.87 -14.401,-9.929 -14.401,-9.925 -14.401,-9.896 -14.421,-9.84 -15.55,-8.201 -15.835,-7.706 -16.877,-4.889 -17.053,-4.371 -17.495,-1.377 -17.54,-0.913 -17.541,-0.904 -17.544,-0.871 -17.555,-0.86 -17.555,-0.361 -17.372,2.601 -17.312,3.169 -15.826,6.639 -15.814,6.668 -15.814,6.731 LED26.1@-16.645,8.571 LED26.3@-16.195,9.35 LED26.5@-15.745,10.129 -13.842,10.492 -13.8,10.5 -13.766,10.531 -13.72,10.577 -12.742,12.057 -12.401,12.441 -12.051,12.791 -9.722,14.637 -9.538,14.755 -9.535,14.757 -9.521,14.767 -9.26,14.973 -6.582,16.299 -6.072,16.531 -3.15,17.277 -2.907,17.32 -2.904,17.321 -2.859,17.33 -2.63,17.395 -2.121,17.395 1.343,17.203 1.347,17.203 1.404,17.203 LED30.1@3.008,18.478 LED30.3@3.888,18.291 LED30.5@4.768,18.104 5.784,16.426 5.794,16.41 5.815,16.389 5.864,16.354 7.683,15.806 8.191,15.587 10.707,13.913 11.138,13.609 11.494,13.252 13.572,11.14 13.697,10.993 13.698,10.992 13.702,10.988 13.955,10.715 15.55,8.201 15.835,7.706 16.886,4.05 16.896,4.013 16.932,3.977 LED29.1@18.503,2.85 LED29.3@18.598,1.955 LED29.5@18.692,1.06 17.587,-0.522 17.56,-0.561 17.56,-0.81 17.501,-1.327 17.068,-4.326 16.892,-4.844 15.86,-7.663 15.686,-7.928 15.683,-7.932 15.661,-7.97 15.575,-8.157 13.988,-10.678 13.605,-11.103 11.535,-13.223 11.178,-13.579 10.995,-13.697 10.991,-13.699 10.978,-13.709 10.748,-13.883 9.144,-14.873 9.129,-14.882 9.093,-14.918 LED28.1@8.428,-16.717 LED28.3@7.606,-17.083 LED28.5@6.784,-17.449
NetIS1_18: IS1.18 LED21.1 LED21.3 LED21.5 LED22.1 LED22.3 LED22.5 LED23.1 LED23.3 LED23.5 LED24.1 LED24.3 LED24.5 LED25.1 LED25.3 LED25.5 | length 137.6
  Top Layer w0.2: IS1.18@1,-6.675 1.01,-6.665 1.01,-6.217 1.127,-6.1 4.827,-6.1 10.4,-11.673 10.4,-16.3 10.025,-16.675 9.525,-16.675 v1(9.5,-16.7)
  Mid Layer 1 w0.15: v1(2.258,18.649) v1(6.1,17.7)
  Mid Layer 2 w0.15: v1(-15.1,-11.3) v1(-12.816,-13.779) ; v1(18.4,3.6) v1(18.8,0.1)
  Bottom Layer w0.15: v1(-15.1,-11.3) -15.681,-10.294 LED22.1@-15.745,-10.129 LED22.3@-16.195,-9.35 LED22.5@-16.645,-8.571 -16.466,-6.724 -17.096,-5.025 -17.29,-4.49 -17.304,-4.412 -17.567,-2.611 -17.575,-2.561 -17.737,-1.491 -17.807,-0.964 -17.807,-0.257 -17.624,2.614 -17.617,2.711 -17.593,2.91 -17.592,2.911 -17.592,2.92 -17.564,3.221 -17.553,3.284 -16.203,6.399 -16.191,6.427 -16.191,6.503 -17.437,8.403 -17.461,8.441 -17.461,8.548 -17.423,8.676 -16.237,10.729 -16.169,10.798 LED21.1@-14.499,11.844 LED21.3@-13.897,12.513 LED21.5@-13.295,13.182 -11.609,13.485 -11.572,13.491 -11.536,13.52 -9.881,14.834 -9.81,14.889 -9.409,15.18 -9.347,15.225 -6.727,16.509 -6.641,16.55 -6.201,16.757 -6.126,16.782 -5,17.1 -2.734,17.647 -2.017,17.647 0.851,17.483 0.855,17.482 1.091,17.482 v1(2.258,18.649) ; v1(-12.816,-13.779) -11.55,-13.512 -11.483,-13.512 -11.443,-13.541 -8.335,-15.799 -8.28,-15.838 -7.735,-16.058 -6.164,-16.681 -6.137,-16.692 ; -6.136,-16.692 -5.02,-17.149 -4.948,-17.165 -4.463,-17.266 -4.377,-17.283 -1.511,-17.781 -0.239,-17.781 1.304,-17.707 1.366,-17.704 1.403,-17.704 1.434,-17.719 LED23.5@3.008,-18.478 LED23.3@3.888,-18.291 LED23.1@4.768,-18.104 6.706,-18.23 6.817,-18.23 7.139,-18.086 8.982,-17.266 9.057,-17.191 9.121,-16.602 ; v1(6.1,17.7) 6.604,17.476 LED25.1@6.784,17.449 LED25.3@7.606,17.083 LED25.5@8.428,16.717 9.306,15.167 9.316,15.149 9.341,15.124 9.391,15.091 10.787,14.164 11.242,13.86 11.746,13.356 13.756,11.311 13.823,11.243 14.206,10.814 15.751,8.355 15.801,8.274 16.059,7.838 16.086,7.774 17.051,4.387 17.061,4.349 ; v1(9.5,-16.7) 9.121,-16.602 ; 17.108,4.303 17.061,4.349 ; v1(18.4,3.6) 17.061,4.349 ; v1(18.8,0.1) 18.697,-0.884 LED24.1@18.692,-1.06 LED24.3@18.598,-1.955 LED24.5@18.503,-2.85 17.231,-4.648 17.218,-4.666 17.203,-4.71 17.144,-4.888 17.111,-4.98 16.111,-7.738 16.077,-7.802 15.784,-8.304 14.24,-10.774 14.186,-10.836 13.857,-11.206 13.788,-11.276 12.75,-12.339 12.747,-12.342 12.707,-12.383 11.786,-13.327 11.282,-13.831 10.833,-14.135 9.35,-15.041 9.335,-15.051 9.299,-15.087 9.279,-15.143 9.121,-16.602
NetIS1_19: IS1.19 LED16.1 LED16.3 LED16.5 LED17.1 LED17.3 LED17.5 LED18.1 LED18.3 LED18.5 LED19.1 LED19.3 LED19.5 LED20.1 LED20.3 LED20.5 | length 144
  Top Layer w0.2: IS1.19@0.6,-6.675 0.61,-6.665 0.61,-6.19 1,-5.8 ; 1.001,-5.8 1.002,-5.798 4.951,-5.798 11.553,-12.4 15,-12.4 16.5,-10.9 16.5,-9.4 16.3,-9.2 16.3,-7.7 16.795,-7.205 v1(17.321,-7.205)
  Mid Layer 2 w0.2: v1(-18.249,-4.349) -16.792,-3.268 -16.78,-3.26 -16.711,-3.191 -16.711,-3.097 -17.098,0.378 -17.099,0.389 -17.099,0.411 -17.09,0.492 -16.703,3.877 -16.7,3.9 -15.507,7.28 -15.5,7.3 -13.61,10.384 -13.6,10.4 -11.775,12.417 -11.723,12.474 -11.723,12.58 v1(-12.205,14.247) ; v1(-17.322,-7.202) -15.4,-7.3 -15.391,-7.316 -13.6,-10.4 -11.1,-12.9 -11.087,-12.909 -8.2,-15 -8.179,-15.009 -4.9,-16.4 -4.882,-16.404 -2.245,-16.99 -2.176,-17.059 -2.16,-17.096 v1(-1.5,-18.7) ; v1(-9.778,16.01) -8.3,14.959 -8.288,14.951 -8.201,14.906 -8.112,14.935 -4.927,16.376 -4.917,16.381 -4.896,16.388 -4.816,16.404 -1.476,17.082 -1.454,17.087 2.129,16.996 2.15,16.996 5.668,16.151 5.686,16.147 8.168,15.034 8.239,15.003 8.339,15.035 v1@9.775,16.009 ; v1@1.501,-18.697 2.091,-17.065 2.153,-16.98 2.229,-16.964 4.891,-16.405 4.908,-16.398 8.25,-15.014 8.268,-15.002 11.22,-12.969 11.235,-12.952 13.538,-10.44 13.593,-10.38 13.606,-10.362 13.612,-10.353 15.342,-7.315 15.397,-7.239 15.493,-7.224 15.508,-7.223 v1(17.321,-7.205) ; v1(12.205,14.247) 11.662,12.517 11.658,12.503 11.642,12.406 11.698,12.33 14.052,9.746 14.06,9.738 14.073,9.72 14.113,9.649 15.79,6.683 15.801,6.663 16.823,3.227 16.829,3.207 17.112,-0.399 17.114,-0.418 16.823,-3.123 16.814,-3.199 16.876,-3.284 v1@18.246,-4.35
  Bottom Layer w0.2: v1(-18.249,-4.349) -18.063,-4.92 LED17.3@-17.785,-5.776 LED17.1@-17.507,-6.632 v1(-17.322,-7.202) ; v1(-12.205,14.247) LED16.1@-11.72,14.6 LED16.3@-10.992,15.129 LED16.5@-10.263,15.658 v1(-9.778,16.01) ; v1(-1.5,-18.7) LED18.5@-0.9,-18.7 LED18.3@0,-18.7 LED18.1@0.9,-18.7 v1(1.5,-18.7) ; v1(9.778,16.01) LED20.1@10.263,15.658 LED20.3@10.992,15.129 LED20.5@11.72,14.6 v1(12.205,14.247) ; v1(17.321,-7.205) LED19.5@17.507,-6.635 LED19.3@17.785,-5.779 LED19.1@18.063,-4.923 v1(18.248,-4.352)